# Altium PCB 4_Lay_PCB.PcbDoc (part 2 of 2)
Units mm, origin at the board's own origin, x right, y up, seen from the top; angles counter-clockwise.
Board outline 51.1 x 56.4 mm, 4 copper layers (Top, Signal Layer 1, Signal Layer 2, Bottom), stack 1.641 mm thick; 149 components, 81 nets, 422 pads, 267 vias.
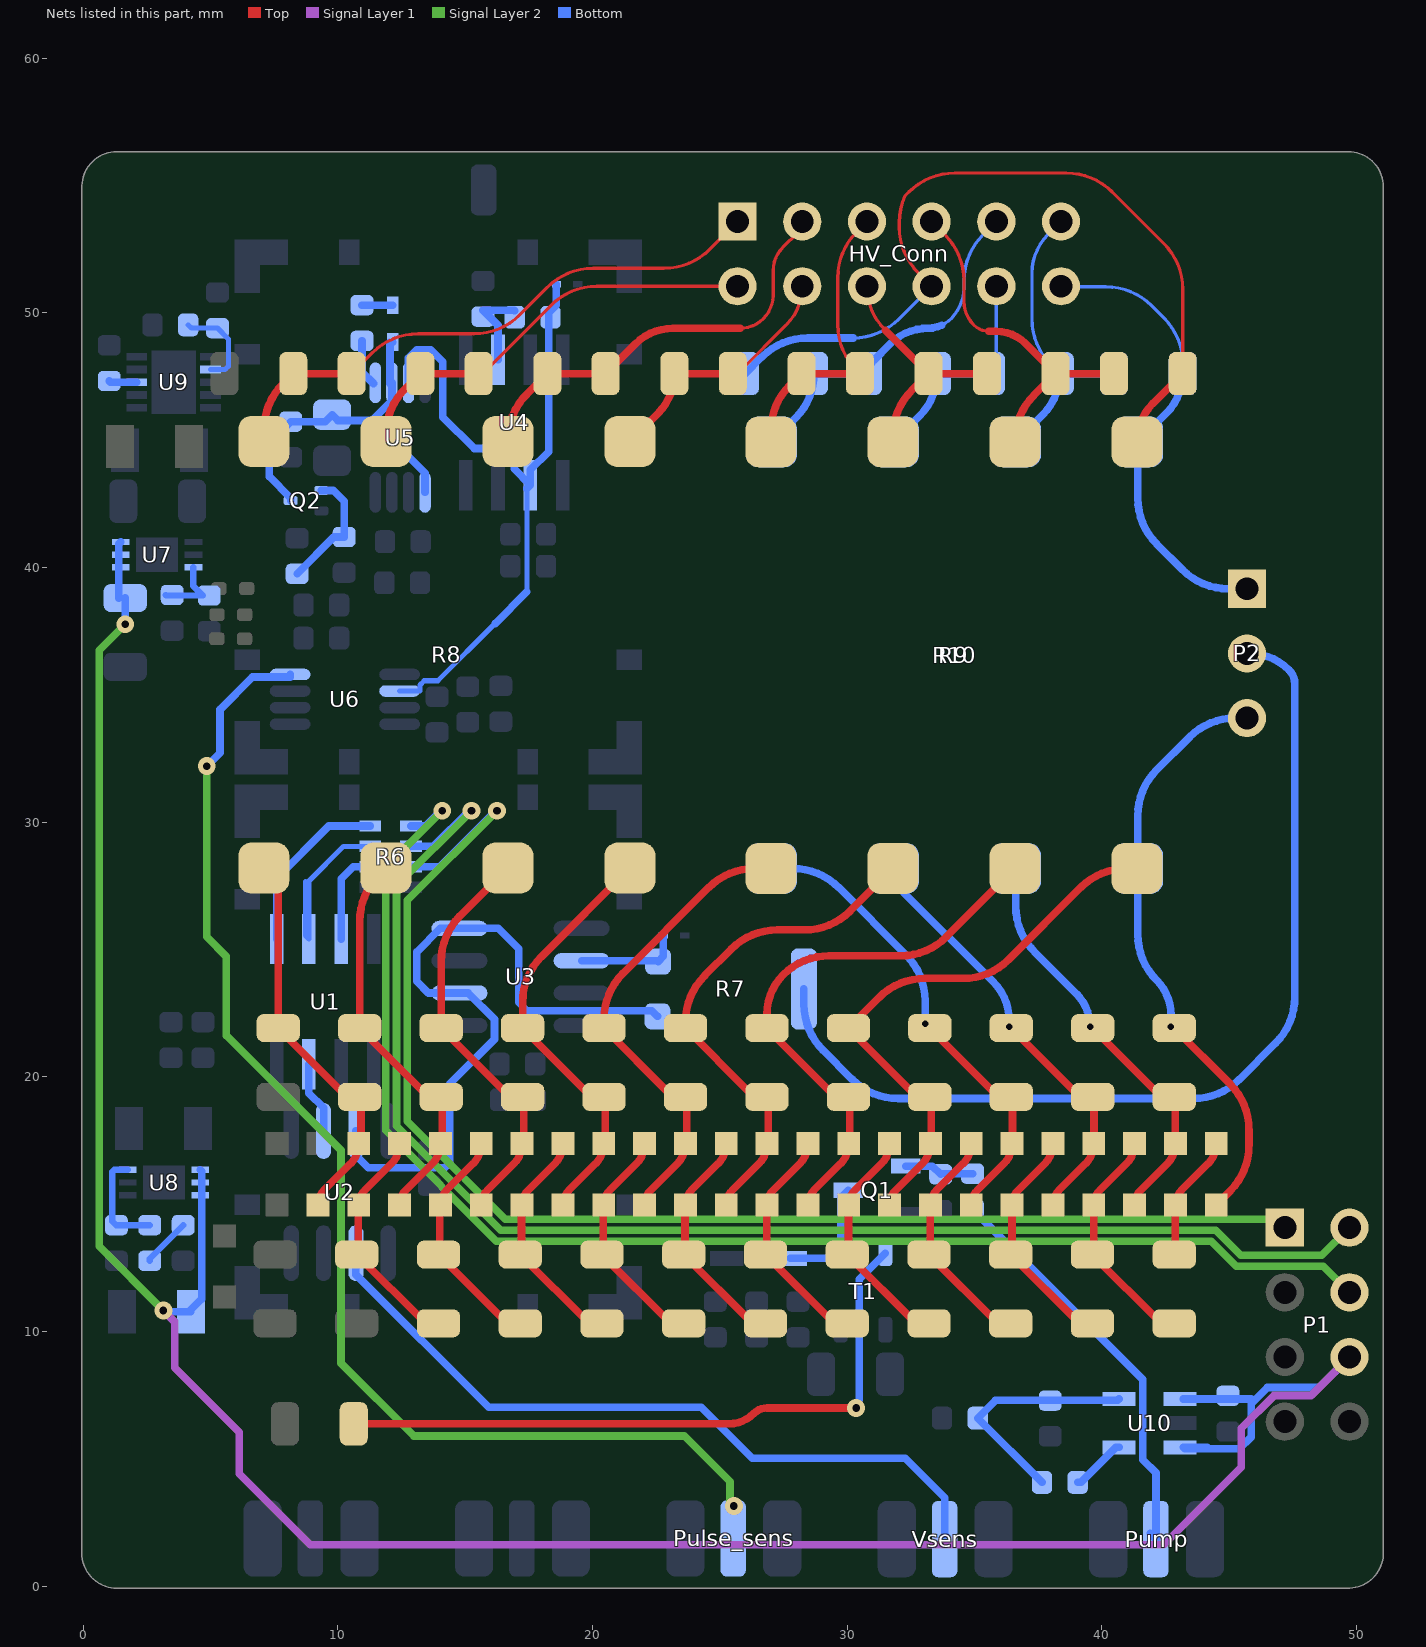
[diagram p4: the nets of this part, all layers, seen from the top]

## Via types
v1: diameter 0.6, hole 0.254, Top to Bottom, tented both sides, 175 vias
v2: diameter 0.6, hole 0.3, Top to Bottom, tented both sides, 53 vias
v3: diameter 0.7, hole 0.3, Top to Bottom, tented both sides, 17 vias
v4: diameter 0.6, hole 0.256, Top to Bottom, tented both sides, 13 vias
v5: diameter 0.6, hole 0.2, Top to Bottom, 4 vias
v6: diameter 3, hole 3, Top to Bottom, 4 vias
v7: diameter 1, hole 0.5, Top to Bottom, tented both sides, 1 vias

## Nets (pads, with @x,y where several pads share a name; then routed paths per layer and width w, separated by ;. In a path a pad name is that pad's centre, name@x,y a point inside that pad or via, vN(x,y) a via of type N, cw(c..) or ccw(c..) an arc to the next point about the centre after c; other vN are vias at no path point) (continued)
NetC7_1: C7.1 C8.2 D5.1 D6.2 | length 8.6
  Top w0.3: C7.1@10.745,13.023 C8.2@13.445,10.323 ; C7.1@10.795,13.145 D5.1@10.795,14.975 ; D5.1@10.821,14.975 cw(c11.626,14.975) 11.057,15.544 12.097,16.584 ccw(c11.306,17.375) D6.2@12.424,17.375
NetC8_1: C8.1 C9.2 D7.1 D8.2 | length 8.6
  Top w0.3: C8.1@13.954,13.023 C9.2@16.654,10.323 ; C8.1@14.005,13.145 D7.1@14.005,14.975 ; D7.1@14.028,14.975 cw(c14.833,14.975) 14.264,15.544 15.304,16.584 ccw(c14.513,17.375) D8.2@15.631,17.375
NetC9_1: C9.1 C10.2 D9.1 D10.2 | length 8.6
  Top w0.3: C9.1@17.164,13.023 C10.2@19.864,10.323 ; C9.1@17.214,13.145 D9.1@17.214,14.975 ; D9.1@17.235,14.975 cw(c18.039,14.975) 17.47,15.544 18.51,16.584 ccw(c17.72,17.375) D10.2@18.838,17.375
NetC10_1: C10.1 C11.2 D11.1 D12.2 | length 8.6
  Top w0.3: C10.1@20.374,13.023 C11.2@23.074,10.323 ; C10.1@20.424,13.145 D11.1@20.424,14.975 ; D11.1@20.441,14.975 cw(c21.246,14.975) 20.677,15.544 21.717,16.584 ccw(c20.926,17.375) D12.2@22.045,17.375
NetC11_1: C11.1 C12.2 D13.1 D14.2 | length 8.6
  Top w0.3: C11.1@23.583,13.023 C12.2@26.283,10.323 ; C11.1@23.634,13.145 D13.1@23.634,14.975 ; D13.1@23.648,14.975 cw(c24.453,14.975) 23.884,15.544 24.924,16.584 ccw(c24.133,17.375) D14.2@25.251,17.375
NetC12_1: C12.1 C13.2 D15.1 D16.2 | length 8.6
  Top w0.3: C12.1@26.793,13.023 C13.2@29.493,10.323 ; C12.1@26.843,13.145 D15.1@26.843,14.975 ; D15.1@26.855,14.975 cw(c27.66,14.975) 27.091,15.544 28.131,16.584 ccw(c27.34,17.375) D16.2@28.458,17.375
NetC13_1: C13.1 C14.2 D17.1 D18.2 | length 8.6
  Top w0.3: C13.1@30.002,13.023 C14.2@32.702,10.323 ; C13.1@30.053,13.145 D17.1@30.053,14.975 ; D17.1@30.062,14.975 cw(c30.866,14.975) 30.297,15.544 31.337,16.584 ccw(c30.547,17.375) D18.2@31.665,17.375
NetC14_1: C14.1 C15.2 D19.1 D20.2 | length 8.6
  Top w0.3: C14.1@33.212,13.023 C15.2@35.912,10.323 ; C14.1@33.263,13.145 D19.1@33.263,14.975 ; D19.1@33.268,14.975 cw(c34.073,14.975) 33.504,15.544 34.544,16.584 ccw(c33.753,17.375) D20.2@34.872,17.375
NetC15_1: C15.1 C16.2 D21.1 D22.2 | length 8.6
  Top w0.3: C15.1@36.422,13.023 C16.2@39.122,10.323 ; C15.1@36.472,13.145 D21.1@36.472,14.975 ; D21.1@36.475,14.975 cw(c37.28,14.975) 36.711,15.544 37.751,16.584 ccw(c36.96,17.375) D22.2@38.078,17.375
NetC16_1: C16.1 C17.2 D23.1 D24.2 | length 9.3
  Top w0.3: D24.2@41.285,17.375 cw(c40.167,17.375) 40.958,16.584 39.918,15.544 ccw(c40.487,14.975) D23.1@39.682,14.975 39.682,13.145 cw(c39.509,13.145) C16.1@39.631,13.023 42.331,10.323 C17.2@42.841,10.323
NetC17_1: C17.1 D25.1 D26.2 | length 4.9
  Top w0.3: C17.1@42.841,13.023 ccw(c42.726,13.138) 42.889,13.138 D25.1@42.889,14.975 cw(c43.693,14.975) 43.124,15.544 44.164,16.584 ccw(c43.374,17.375) D26.2@44.492,17.375
NetC18_1: C18.1 C19.2 D4.1 D5.2 R8.8 | length 14.8
  Top w0.3: R8.8@7.096,28.197 7.662,27.631 C18.1@7.662,21.913 C19.2@10.172,19.403 ; D4.1@9.218,14.975 cw(c10.023,14.975) 9.453,15.544 10.494,16.584 ccw(c9.703,17.375) D5.2@10.821,17.375 ; D5.2@10.908,17.375 C19.2@10.908,19.098
NetC19_1: C19.1 C20.2 D6.1 D7.2 R8.7 | length 14.9
  Top w0.3: R8.7@11.887,28.197 11.604,27.914 ccw(c13.4,26.118) 10.86,26.118 C19.1@10.86,21.913 C20.2@13.371,19.403 ; D6.1@12.424,14.975 cw(c13.229,14.975) 12.66,15.544 13.7,16.584 ccw(c12.909,17.375) D7.2@14.028,17.375 ; D7.2@14.106,17.375 C20.2@14.106,19.098
NetC20_1: C20.1 C21.2 D8.1 D9.2 R8.6 | length 15.5
  Top w0.3: D8.1@15.631,14.975 cw(c16.436,14.975) 15.867,15.544 16.907,16.584 ccw(c16.116,17.375) D9.2@17.235,17.375 ; C21.2@16.569,19.403 C20.1@14.058,21.913 14.058,24.524 cw(c16.598,24.524) 14.802,26.32 R8.6@16.679,28.197 ; D9.2@17.304,17.375 C21.2@17.304,19.098
NetC21_1: C21.1 C22.2 D10.1 D11.2 R8.5 | length 16.2
  Top w0.3: D10.1@18.838,14.975 cw(c19.643,14.975) 19.074,15.544 20.114,16.584 ccw(c19.323,17.375) D11.2@20.441,17.375 ; C22.2@19.767,19.403 C21.1@17.256,21.913 17.256,22.931 cw(c19.796,22.931) 18,24.727 R8.5@21.471,28.197 ; D11.2@20.502,17.375 C22.2@20.502,19.098
NetC22_1: C22.1 C23.2 D12.1 D13.2 R9.8 | length 18
  Top w0.3: D12.1@22.045,14.975 cw(c22.85,14.975) 22.28,15.544 23.321,16.584 ccw(c22.53,17.375) D13.2@23.648,17.375 ; C23.2@22.965,19.403 C22.1@20.454,21.913 20.454,22.27 cw(c22.994,22.27) 21.198,24.066 24.571,27.439 cw(c26.367,25.643) 26.367,28.183 R9.8@27,28.183 ; D13.2@23.7,17.375 C23.2@23.7,19.098
NetC23_1: C23.1 C24.2 D14.1 D15.2 R9.7 | length 19.4
  Top w0.3: D14.1@25.251,14.975 cw(c26.056,14.975) 25.487,15.544 26.527,16.584 ccw(c25.736,17.375) D15.2@26.855,17.375 ; C24.2@26.163,19.403 C23.1@23.652,21.913 23.652,22.166 cw(c26.192,22.166) 24.396,23.962 25.46,25.026 cw(c27.256,23.23) 27.256,25.77 28.327,25.77 ccw(c28.327,28.31) 30.123,26.514 R9.7@31.792,28.183 ; D15.2@26.898,17.375 C24.2@26.898,19.098
NetC24_1: C24.1 C25.2 D16.1 D17.2 R9.6 | length 21.1
  Top w0.3: D16.1@28.458,14.975 cw(c29.263,14.975) 28.694,15.544 29.734,16.584 ccw(c28.943,17.375) D17.2@30.062,17.375 ; C25.2@29.361,19.403 C24.1@26.851,21.913 26.851,22.461 cw(c29.041,22.461) 27.492,24.01 cw(c29.288,22.214) 29.288,24.754 32.103,24.754 ccw(c32.103,27.294) 33.899,25.498 R9.6@36.584,28.183 ; D17.2@30.096,17.375 C25.2@30.096,19.098
NetC25_1: C25.1 C26.2 D18.1 D19.2 R9.5 | length 21.9
  Top w0.3: D18.1@31.665,14.975 cw(c32.47,14.975) 31.901,15.544 32.941,16.584 ccw(c32.15,17.375) D19.2@33.268,17.375 ; C26.2@32.559,19.403 C25.1@30.049,21.913 31.257,23.121 cw(c33.053,21.325) 33.053,23.865 34.55,23.865 ccw(c34.55,26.405) 36.346,24.609 39.176,27.439 cw(c40.972,25.643) 40.972,28.183 R9.5@41.375,28.183 ; D19.2@33.294,17.375 C26.2@33.294,19.098
NetC26_1: C26.1 C27.2 D20.1 D21.2 R10.5 | length 17.7
  Top w0.3: C26.1@33.247,21.913 C27.2@35.757,19.403 ; D20.1@34.872,14.975 cw(c35.677,14.975) 35.107,15.544 36.148,16.584 ccw(c35.357,17.375) D21.2@36.475,17.375 ; D21.2@36.492,17.375 C27.2@36.492,19.098
  Bottom w0.3: R10.5@27.035,28.183 27.865,28.183 cw(c27.865,25.643) 29.661,27.439 32.318,24.782 cw(c30.522,22.986) 33.062,22.986 v1(33.062,22.087)
NetC27_1: C27.1 C28.2 D22.1 D23.2 R10.6 | length 16.2
  Top w0.3: C27.1@36.445,21.913 C28.2@38.955,19.403 ; D22.1@38.078,14.975 cw(c38.883,14.975) 38.314,15.544 39.354,16.584 ccw(c38.563,17.375) D23.2@39.682,17.375 ; D23.2@39.691,17.375 C28.2@39.691,19.098
  Bottom w0.3: R10.6@31.826,28.183 ccw(c33.136,28.183) 32.21,27.257 35.735,23.732 cw(c34.218,22.214) 36.364,22.214 v1(36.364,21.96)
NetC28_1: C28.1 C29.2 D24.1 D25.2 R10.7 | length 16.3
  Top w0.3: C28.1@39.643,21.913 42.153,19.403 ccw(c42.889,20.138) 42.889,19.098 D25.2@42.889,17.375 cw(c41.77,17.375) 42.561,16.584 41.521,15.544 ccw(c42.09,14.975) D24.1@41.285,14.975
  Bottom w0.3: R10.7@36.618,28.183 36.618,26.695 ccw(c39.158,26.695) 37.362,24.899 39,23.261 cw(c37.699,21.96) v1(39.539,21.96)
NetC29_1: C29.1 D26.1 P2.3 R10.8 | length 23.4
  Top w0.3: C29.1@42.841,21.913 45.031,19.723 cw(c43.235,17.927) 45.775,17.927 45.775,17.31 cw(c43.235,17.31) 45.031,15.514 D26.1@44.492,14.975
  Bottom w0.3: v1(42.714,21.96) 42.714,22.437 ccw(c40.801,22.437) 42.154,23.79 cw(c43.95,25.586) 41.41,25.586 R10.8@41.41,28.183 41.41,30.258 cw(c43.95,30.258) 42.154,32.054 43.441,33.341 cw(c45.237,31.545) 45.237,34.085 P2.3@45.7,34.085
NetC55_1: C55.1 R19.1 U7.3 | length 2.7
  Bottom w0.25: R19.1@3.245,38.921 3.266,38.9 4.7,38.9 4.329,39.271 U7.3@4.329,40.004
NetC58_1: C58.1 R20.2 U8.3 | length 4.1
  Bottom w0.25: U8.3@1.75,16.35 1.225,16.35 1.148,16.273 1.148,14.329 C58.1@1.303,14.175 R20.2@2.615,14.175
NetC61_1: C61.1 R23.2 U9.7 | length 3.6
  Bottom w0.2: R23.2@4.125,49.525 4.25,49.4 C61.1@5.275,49.4 5.7,48.975 5.7,47.9 5.575,47.775 U9.7@5,47.775
NetC63_1: C63.1 U10.4 | length 2.2
  Bottom w0.3: C63.1@39.05,4.075 39.18,4.075 40.555,5.45 U10.4@40.675,5.45
NetC63_2: C63.2 C64.1 R3.2 U10.5 | length 9.4
  Bottom w0.3: C63.2@37.65,4.075 R3.2@35.125,6.6 35.825,7.3 40.625,7.3 U10.5@40.675,7.35
NetD1_K: D1.K Q1.3 T1.4 | length 4.7
  Bottom w0.3: D1.K@27.771,12.872 29.546,12.872 T1.4@29.746,13.072 29.746,15.247 Q1.3@30.046,15.547
NetD27_2: D27.2 R7.3 U3.2 | length 4.1
  Bottom w0.3: U3.2@19.575,24.56 22.575,24.56 R7.3@22.575,24.525 22.78,24.73 D27.2@22.78,25.55
NetD28_1: D28.1 R11.2 | length 1.2
  Bottom w0.3: R11.2@10.95,50.3 D28.1@12.15,50.3
NetP2_2: P2.2 R7.1 | length 38.6
  Bottom w0.3: R7.1@28.3,23.45 28.3,22.852 ccw(c30.84,22.852) 29.044,21.056 30.206,19.894 ccw(c32.002,21.69) 32.002,19.15 43.598,19.15 ccw(c43.598,21.69) 45.394,19.894 46.831,21.331 ccw(c45.035,23.127) 47.575,23.127 47.575,35.432 ccw(c46.807,35.432) 47.35,35.975 ccw(c45.781,34.406) 45.781,36.625 P2.2@45.7,36.625
NetQ1_1: Q1.1 R4.2 R5.2 | length 2.8
  Bottom w0.3: Q1.1@32.296,16.497 33.346,16.497 R5.2@33.671,16.172 33.671,16.197 R4.2@34.921,16.197
NetQ2_1: Q2.1 R13.1 R16.1 | length 4.9
  Bottom w0.3: R16.1@8.4,39.75 9.85,41.2 R13.1@10.25,41.2 10.25,42.6 9.825,43.025 Q2.1@9.35,43.025
NetR6_1: R6.1 U1.1 | length 6.9
  Bottom w0.3: U1.1@7.595,25.414 7.595,27.795 9.65,29.85 R6.1@11.275,29.85
NetR6_2: R6.2 U1.2 | length 7.6
  Bottom w0.2: 8.725,27.675 8.725,25.554 U1.2@8.865,25.414 8.865,27.69 10.225,29.05 R6.2@11.275,29.05
NetR6_3: R6.3 U1.3 | length 3.7
  Bottom w0.3: U1.3@10.135,25.414 10.135,27.785 10.6,28.25 R6.3@11.275,28.25
NetR11_1: R11.1 U5.1 | length 1.9
  Bottom w0.3: R11.1@10.95,48.9 10.95,47.675 U5.1@11.4,47.225
NetR12_2: R12.2 R14.2 U4.2 | length 3.4
  Bottom w0.3: U4.2@16.29,48.164 16.29,49.51 15.7,50.1 16.89,50.1 cw(c16.89,50.015) R14.2@16.95,50.075
NetR20_1: R20.1 R21.2 | length 1.9
  Bottom w0.25: R20.1@2.615,12.775 2.615,12.862 R21.2@3.928,14.175
NetR22_2: R22.2 U9.3 | length 1.1
  Bottom w0.3: R22.2@1.025,47.325 1.075,47.275 U9.3@2.104,47.275
NetU1_7: U1.7 U2.2 | length 2.8
  Bottom w0.3: U1.7@8.865,20.486 8.865,19.36 9.44,18.785 U2.2@9.44,17.875
PEAKVOLTAGE: C44.1 D28.2 Q2.3 R15.1 U5.2 U5.5 | length 14.4
  Bottom w0.3: Q2.3@8.15,42.625 8.15,42.725 7.3,43.575 7.3,44.875 R15.1@8.15,45.725 9.5,45.725 C44.1@9.775,46 10,45.775 11.35,45.775 ; U5.2@12.05,47.225 12.05,48.85 D28.2@12.15,48.85 ; U5.2@12.125,47.25 12.125,46.55 11.35,45.775 ; U5.5@13.425,42.95 13.425,43.7 11.35,45.775
PREAMPSIGOUT: D29.1 R14.1 U4.6 U5.3 U6.2 | length 28.9
  Bottom w0.2: U6.2@12.425,35.15 13.223,35.15 13.223,35.384 13.391,35.552 13.927,35.552 16.175,37.8 ; 17.425,39.05 U4.6@17.425,43.101
  Bottom w0.3: U5.3@12.775,47.25 12.775,48.225 13.1,48.55 13.65,48.55 14.125,48.075 14.125,45.9 15.35,44.675 16.525,44.675 16.925,44.275 16.925,43.871 U4.6@17.56,43.236 ; 16.175,37.8 17.425,39.05 ; U4.6@17.425,43.101 U4.6@17.56,43.236 ; D29.1@18.58,51.125 18.58,50.305 18.275,50 18.275,44.55 17.56,43.835 U4.6@17.56,43.236
PULSE: Pump.1 R4.1 | length 16.2
  Bottom w0.3: R4.1@34.921,14.797 41.602,8.116 41.602,4.973 42.125,4.45 Pump.1@42.125,1.85 Pump.1@41.902,2.073
PULSESENS: Pulse_sens.1 U6.8 | length 49.7
  Signal Layer 2 w0.3: v3(4.85,32.2) 4.85,25.5 5.625,24.725 5.625,21.625 10.125,17.125 10.125,8.75 12.975,5.9 23.6,5.9 25.4,4.1 25.4,3.3 v3(25.55,3.15)
  Bottom w0.3: v3(4.85,32.2) 5.375,32.725 5.375,34.425 6.648,35.698 8.125,35.698 U6.8@8.125,35.8
PUMP: C5.2 T1.3 | length 26.8
  Top w0.3: C5.2@10.625,6.375 25.359,6.375 ccw(c25.359,7.741) 26.325,6.775 ; 26.325,6.775 cw(c26.868,6.232) 26.868,7 v3(30.35,7)
  Bottom w0.3: v3(30.35,7) 30.35,6.789 ccw(c29.033,7.367) 30.471,7.367 30.471,12.047 T1.3@31.496,13.072
UP1: C31.1 C32.2 HV_Conn.1 R8.4 | length 22.5
  Top w0.127: C32.2@10.539,47.614 11.356,48.431 cw(c13.152,46.635) 13.152,49.175 15.348,49.175 ccw(c15.348,51.715) 17.144,49.919 18.231,51.006 cw(c20.027,49.21) 20.027,51.75 22.811,51.75 ccw(c22.811,54.29) 24.607,52.494 HV_Conn.1@25.696,53.583
  Top w0.3: R8.4@7.096,44.947 7.096,45.408 cw(c9.636,45.408) 7.84,47.204 C31.1@8.25,47.614 C32.2@10.539,47.614
UP2: C32.1 C33.2 HV_Conn.2 R8.3 | length 16.9
  Top w0.127: C33.2@15.529,47.614 ccw(c15.529,48.001) 15.802,47.727 18.374,50.299 cw(c20.17,48.503) 20.17,51.043 HV_Conn.2@25.696,51.043
  Top w0.3: R8.3@11.887,44.947 11.887,45.21 cw(c14.427,45.21) 12.631,47.006 C32.1@13.239,47.614 C33.2@15.529,47.614
UP3: C33.1 C34.2 HV_Conn.3 R8.2 | length 16.7
  Top w0.127: 25.792,49.392 ccw(c25.792,50.693) 26.712,49.773 ccw(c25.792,50.693) 27.093,50.693 27.093,51.647 cw(c28.394,51.647) 27.474,52.567 28.056,53.149 ccw(c27.623,53.583) HV_Conn.3@28.236,53.583
  Top w0.3: R8.2@16.679,44.947 16.679,45.012 cw(c19.219,45.012) 17.423,46.808 C33.1@18.229,47.614 C34.2@20.518,47.614 21.688,48.784 cw(c23.156,47.315) 23.156,49.392 25.792,49.392
UP4: C34.1 C35.2 HV_Conn.4 R8.1 | length 10.1
  Top w0.127: C35.2@25.83,47.748 27.607,49.525 ccw(c26.09,51.043) HV_Conn.4@28.236,51.043
  Top w0.3: R8.1@21.471,44.947 22.567,46.044 ccw(c20.997,47.614) C34.1@23.218,47.614 C35.2@25.507,47.614 ccw(c25.507,48.07) C35.2@25.83,47.748
UP5: C35.1 C36.2 HV_Conn.5 R9.4 | length 11.9
  Top w0.127: C36.2@30.377,47.733 cw(c32.173,49.53) 29.633,49.53 29.633,51.388 cw(c32.173,51.388) 30.377,53.184 HV_Conn.5@30.776,53.583
  Top w0.3: R9.4@27,44.933 27,45.355 cw(c29.54,45.355) 27.744,47.151 C35.1@28.207,47.614 C36.2@30.496,47.614 C36.2@30.377,47.733
UP6: C36.1 C37.2 HV_Conn.6 R9.3 | length 9.8
  Top w0.127: HV_Conn.6@30.776,51.043 ccw(c33.211,51.043) 31.093,49.842 ccw(c33.211,51.043) 31.16,49.73 ccw(c33.211,51.043) 31.489,49.321
  Top w0.3: 31.489,49.321 C36.1@33.196,47.614 ; R9.3@31.792,44.933 31.792,45.157 cw(c34.332,45.157) 32.536,46.954 C36.1@33.196,47.614 ; C37.2@35.486,47.614 C36.1@33.196,47.614
UP7: C37.1 C38.2 HV_Conn.7 R9.2 | length 14
  Top w0.127: HV_Conn.7@33.316,53.583 33.842,53.057 cw(c32.046,51.261) 34.586,51.261 34.586,50.461 ccw(c35.918,50.461) 34.976,49.519 ccw(c35.567,50.11) 35.567,49.274
  Top w0.3: 35.567,49.274 35.856,49.274 cw(c35.856,47.658) 36.999,48.801 C37.1@38.186,47.614 ; R9.2@36.584,44.933 36.584,44.96 cw(c39.124,44.96) 37.328,46.756 C37.1@38.186,47.614 ; C38.2@40.475,47.614 C37.1@38.186,47.614
UP8: C38.1 C39.2 HV_Conn.8 R9.1 | length 32.6
  Top w0.127: HV_Conn.8@33.316,51.043 32.79,51.569 cw(c34.586,53.365) 32.046,53.365 32.046,53.547 cw(c34.586,53.547) 32.27,54.591 32.424,54.744 cw(c34.22,52.948) 34.22,55.488 38.614,55.488 cw(c38.614,52.948) 40.41,54.744 42.431,52.723 cw(c40.635,50.927) 43.175,50.927 C38.1@43.175,47.614
  Top w0.3: R9.1@41.375,44.933 cw(c43.503,44.933) 41.999,46.438 C38.1@43.175,47.614
  Bottom w0.127: 30.232,49.011 ccw(c30.232,51.551) 32.028,49.755 HV_Conn.8@33.316,51.043
  Bottom w0.3: C39.2@25.997,47.614 26.65,48.267 cw(c28.446,46.471) 28.446,49.011 30.232,49.011
UP9: C39.1 C40.2 HV_Conn.9 R10.1 | length 13.9
  Bottom w0.127: 33.717,49.518 ccw(c33.158,50.693) 34.078,49.773 ccw(c32.852,50.999) 34.586,50.999 34.586,51.261 cw(c37.126,51.261) 35.33,53.057 HV_Conn.9@35.856,53.583
  Bottom w0.3: R10.1@27.035,44.933 27.977,45.875 ccw(c26.238,47.614) C39.1@28.697,47.614 C40.2@30.823,47.614 cw(c31.55,47.614) C40.2@31.036,48.128 ; C40.2@31.036,48.128 31.693,48.785 cw(c33.158,47.32) 32.958,49.382 cw(c33.158,47.32) 33.158,49.392 ccw(c33.158,50.693) 33.717,49.518
UP10: C40.1 C41.2 HV_Conn.10 R10.2 | length 8.9
  Bottom w0.127: C41.2@35.856,48.114 HV_Conn.10@35.856,51.043
  Bottom w0.3: R10.2@31.826,44.933 32.827,45.934 ccw(c31.147,47.614) C40.1@33.523,47.614 C41.2@35.649,47.614 ccw(c35.149,48.114) C41.2@35.856,48.114
UP11: C41.1 C42.2 HV_Conn.11 R10.3 | length 12.6
  Bottom w0.127: C41.1@37.997,47.966 cw(c39.793,49.762) 37.253,49.762 37.253,51.551 cw(c39.399,51.551) 37.882,53.069 HV_Conn.11@38.396,53.583
  Bottom w0.3: R10.3@36.618,44.933 37.677,45.992 ccw(c36.055,47.614) C41.1@38.349,47.614 ; C41.1@37.997,47.966 C41.1@38.349,47.614 ; C41.1@38.523,48.034 cw(c37.929,48.034) C41.1@38.349,47.614 ; C42.2@40.475,47.614 C41.1@38.349,47.614
UP12: C42.1 HV_Conn.12 P2.1 R10.4 | length 18.1
  Bottom w0.127: HV_Conn.12@38.777,51.021 40.16,51.021 cw(c40.16,48.481) 41.956,50.277 42.431,49.802 cw(c40.635,48.006) C42.1@43.175,48.006
  Bottom w0.3: C42.1@43.175,48.006 C42.1@43.175,47.614 cw(c40.964,47.614) 42.528,46.051 R10.4@41.41,44.933 41.41,42.717 ccw(c43.95,42.717) 42.154,40.921 43.166,39.909 ccw(c44.962,41.705) 44.962,39.165 P2.1@45.7,39.165
V_IN: C3.1 C56.1 C62.1 P1.6 U7.4 U7.5 U7.6 U8.4 U8.5 U8.6 U10.1 U10.3 | length 107.4
  Signal Layer 1 w0.3: v3(3.15,10.825) 3.6,10.375 3.6,8.578 6.129,6.049 6.129,4.41 8.914,1.625 42.425,1.625 45.475,4.675 45.475,6.202 46.76,7.487 48.212,7.487 P1.6@49.725,9
  Signal Layer 2 w0.3: v3(1.65,37.775) 0.625,36.75 0.625,13.35 v3(3.15,10.825)
  Bottom w0.3: C3.1@1.4,38.8 1.4,40.925 U7.6@1.479,41.004 ; v3(1.65,37.775) C3.1@1.65,38.8 ; v3(3.15,10.825) 3.2,10.775 C56.1@4.225,10.775 ; C56.1@4.225,10.85 4.655,11.28 4.655,16.295 U8.4@4.6,16.35 ; U10.1@43.2,7.35 45.859,7.35 45.859,7.168 ; 44.141,5.45 43.2,5.45 43.252,5.398 45.398,5.398 45.859,5.859 45.859,7.168 ; P1.6@49.725,9 48.525,7.8 46.491,7.8 45.859,7.168
VDIGISENSCAN: U2.6 Vsens.1 | length 29
  Bottom w0.3: U2.6@10.71,13.075 10.71,12.24 15.925,7.025 24.275,7.025 26.275,5.025 32.275,5.025 33.825,3.475 Vsens.1@33.825,2.025
VDIGISETCANCLK: P1.4 R6.5 | length 55.4
  Signal Layer 2 w0.3: v3(14.101,30.451) 11.875,28.226 11.875,17.9 16.225,13.55 44.296,13.55 45.279,12.567 48.698,12.567 P1.4@49.725,11.54
  Bottom w0.3: R6.5@12.875,29.85 13.45,29.85 14.051,30.451 v3(14.101,30.451)
VDIGISETCANCS: P1.1 R6.7 | length 54.1
  Signal Layer 2 w0.3: v3(16.251,30.451) 12.729,26.93 12.729,18.254 16.579,14.404 46.861,14.404 P1.1@47.185,14.08
  Bottom w0.3: R6.7@12.875,28.25 14,28.25 16.201,30.451 v3(16.251,30.451)
VDIGISETCANDIN: P1.2 R6.6 | length 56.5
  Signal Layer 2 w0.3: v3(15.251,30.451) 12.302,27.503 12.302,18.077 16.402,13.977 44.473,13.977 45.456,12.994 48.639,12.994 P1.2@49.725,14.08
  Bottom w0.3: R6.6@12.875,29.05 13.75,29.05 15.151,30.451 v3(15.251,30.451)
VSENS: R7.2 U2.3 U3.6 U3.8 | length 28.6
  Bottom w0.3: U2.3@10.71,17.875 10.71,16.915 11.2,16.425 14.2,16.425 14.4,16.625 14.4,19.725 16.152,21.477 16.152,22.259 15.121,23.29 U3.6@14.775,23.29 13.56,23.29 13.1,23.75 13.1,24.9 14.03,25.83 U3.8@14.775,25.83 16.295,25.83 17.1,25.025 17.1,22.925 17.425,22.6 22.325,22.6 R7.2@22.55,22.375
pads on no net: R6.4 R6.8 U1.4 U2.1 U2.5 U2.8 U3.5 U4.4 U4.8 U6.7
copper on no net:
  other v6: 3,3.175 48.025,3.25 3,53.025 48.025,53.05

## Polygon pours and split planes (outlines as drawn)
+5ANALOG on Signal Layer 2 "+5A" (solid, pour order 59): 0.907,20.367 3.943,20.367 5.95,18.36 5.95,11.725 5.925,11.7 5.85,11.625 2.9,11.625 2.749,11.625 0.907,13.467
GND on Signal Layer 2 "GND" (solid, pour order 101): 22.075,13.125 50.35,13.125 51.05,12.425 51.15,12.325 51.15,-0.725 37.05,-0.725 36.975,-0.8 36.7,-0.525 36.7,4.225 36.65,4.225 34.25,6.625 34.2,6.675 27.175,6.675 27.05,6.675 22.2,11.525
NEGATIVE_V_IN on Signal Layer 2 "+5A" (solid, pour order 61): 5.675,49.575 1.525,49.575 1.525,45.68 1.738,45.467 2.072,45.8 5.7,45.8
+2.5ANALOG on Signal Layer 2 "+2.5" (solid, pour order 64): 1.567,46.18 3.914,46.18 3.914,39.789 3.875,39.75 2.416,38.291 1.668,38.291
AGND on Signal Layer 2 "Top Layer-No Net" (solid, pour order 68): 21.975,52.9 5.975,52.9 5.975,31.85 5.975,31.9 21.975,31.9
AGND on Signal Layer 2 "Top Layer-No Net" (solid, pour order 70): 21.95,31.475 5.95,31.475 5.95,10.45 21.95,10.45 21.95,31.475
AGND on Signal Layer 2 "Top Layer-No Net" (solid, pour order 73): 6.05,11.475 6.05,0.15 6.225,-0.025 6.275,0.025 36.35,0.025 36.35,3.95 34.2,6.1 27.3,6.1 26.55,6.85 21.925,11.475 17.825,11.475
AGND on Signal Layer 2 "Top Layer-No Net" (solid, pour order 77): 21.375,26.45 23.284,26.45 cw(c23.284,25.084) 24.25,26.05 24.25,23.791 cw(c22.884,23.791) 23.85,22.825 cw(c23.609,23.066) 23.609,22.725 20.8,22.725
AGND on Signal Layer 2 "Top Layer-No Net" (solid, pour order 80): 6.375,46.55 0.546,46.55 ccw(c0.546,46.379) 0.425,46.5 0.425,8.55 5.75,3.225 5.8,3.175 6.75,3.175
GND on Bottom "+5A" (solid, pour order 105): 51.237,8.575 41.85,8.575 41.075,7.8 42.981,5.894 42.981,0.313 51.437,0.313 52.675,-0.925
AGND on Bottom "+5A" (solid, pour order 103): 11.125,11.6 11.075,11.55 11.075,6.75 7.15,6.75 7.025,6.875 6.6,7.3 6.6,11.825
AGND on Bottom "Top Layer-No Net" (solid, pour order 99): 36.875,-0.15 36.875,4.25 34.975,6.15 31.8,9.325 6.25,9.325 6.25,0.1 6.3,0.05
GND on Bottom "Top Layer-No Net" (solid, pour order 87): 0.025,42.525 5.5,42.525 5.775,42.8 5.575,43 5.575,51.425 0,51.425 -0.1,51.525
GND on Bottom "Top Layer-No Net" (solid, pour order 83): 0.525,17.45 0.55,17.425 2.9,17.425 2.9,20.4 1.55,21.75 1.325,21.975 1.325,33.7 1.325,34.4 3.775,36.85 3.875,36.95 4.875,36.95 4.875,43.275 4.25,43.9 4.225,43.925 -0.05,43.925 -0.05,17.375
GND on Bottom "Top Layer-No Net" (solid, pour order 81): -0.05,19.175 5.35,19.175 5.675,18.85 5.675,14.675 5.675,13.05 5.675,9.15 1.625,9.15 -0.05,9.15
AGND on Bottom "Top Layer-No Net" (solid, pour order 67): 6,52.85 6,31.85 22,31.85 21.925,31.85 21.925,52.85 19.125,52.85 19.125,45.65 13.65,45.65 13.65,52.9
GND on Bottom "Top Layer-No Net" (solid, pour order 69): 36.146,17.172 23.546,17.172 23.875,8.8 36.121,8.25 36.121,17.197
AGND on Bottom "Top Layer-No Net" (solid, pour order 71): 21.925,31.45 5.95,31.45 5.95,10.4 21.975,10.4
GND on Bottom "Top Layer-No Net" (solid, pour order 72): 38.425,0.125 38.425,3.75 35.1,7.075 32.275,9.9 32.275,17.05 36.875,17.05 45.25,8.675 45.725,8.2 45.725,0.175
GND on Bottom "+5A" (solid, pour order 58): 39.384,6.46 39.149,6.225 31.025,6.225 29.725,6.225 28.975,6.975 28.85,7.1 28.85,12.85 29.35,12.85 32.825,16.325 34.537,14.613 36.121,14.613 36.121,13.254 41.825,7.55
AGND on Top "+5A" (solid, pour order 109): 13.864,49.637 9.878,49.122 6.303,49.122 5.303,50.122 5.028,50.397 5.028,56.122 12.903,56.122 13.003,56.022
GND on Top "+5A" (solid, pour order 107): 51.275,7.85 45.575,7.85 44.85,7.125 45,6.975 45,-0.05 51.45,-0.05 51.6,-0.2
+5ANALOG on Top "+5A" (solid, pour order 63): 2.006,16.775 4.425,16.775 4.425,16.675 4.45,16.65 4.45,14.825 4.6,8.7 0.425,8.8 0.425,15.05
+2.5ANALOG on Top "+2.5" (solid, pour order 65): 1.608,42.975 3.914,42.975 3.914,38.614 3.9,38.6 1.664,38.6
AGND on Top "Top Layer-No Net" (solid, pour order 93): 5.225,36.525 3.725,36.65 1.4,34.325 1.444,34.281 1.444,22.444 1.444,21.956 2.55,20.85 2.775,21.075 5.4,21.075 5.4,29.925 5.225,30.85
NEGATIVE_V_IN on Top "Top Layer-No Net" (solid, pour order 89): 0.95,46.225 0.975,46.2 4.825,46.2 4.825,50.825 4.25,51.4 4.05,51.2 -0.025,51.2 -0.025,49.225 0,49.2 0,46.2
AGND on Top "Top Layer-No Net" (solid, pour order 74): 21.775,41.9 6.025,41.9 6.025,30.775 21.825,30.775 21.825,30.85
GND on Top "Top Layer-No Net" (solid, pour order 75): 0.275,46.075 5.425,46.075 5.425,36.8 3.45,36.6 1.533,33.939 1.332,22.404 2.375,20.915 5.425,20.915 5.597,15.05 0.1,15.05
AGND on Top "Top Layer-No Net" (solid, pour order 76): 6.2,4.35 16.9,5.6 25.275,5.6 26.55,5.969 35.85,5.969 35.85,0.625 35.85,0.45 6.125,0.45
GND on Top "Top Layer-No Net" (solid, pour order 79): 45.75,0.3 37.86,0.3 ccw(c37.86,0.215) 37.8,0.275 37.319,0.756 cw(c39.115,2.552) 36.575,2.552 36.575,7.525 45.765,7.525 cw(c45.765,7.44) 45.825,7.5
+5ANALOG on Signal Layer 1 "+5A" (solid, pour order 60): 1.4,20.8 3.65,20.8 5.325,19.125 5.2,19 5.2,12.225 2.822,12.225 1.433,13.613
NEGATIVE_V_IN on Signal Layer 1 "GND" (solid, pour order 62): 5.15,49.125 5.1,49.075 1.5,49.075 1.5,45.2 1.525,45.175 1.75,45.4 5.2,45.4
+2.5ANALOG on Signal Layer 1 "+2.5" (solid, pour order 66): 1.608,42.975 3.914,42.975 3.914,39.789 3.875,39.75 2.35,38.225 1.669,38.225
AGND on Signal Layer 1 "Top Layer-No Net" (solid, pour order 97): 36.7,0.025 36.7,4.775 32.7,8.775 32.6,8.875 5.8,8.875 5.4,8.875 3.375,6.85 5,5.225 5,0.1
GND on Signal Layer 1 "Top Layer-No Net" (solid, pour order 95): 0.025,50.95 0.1,50.875 5.275,50.875 5.275,37.675 4.175,36.575 1.799,34.199 1.799,33.864 1.799,22.551 4.725,19.625 5.3,19.05 5.3,9 1.65,9 -0.025,10.675
AGND on Signal Layer 1 "Top Layer-No Net" (solid, pour order 85): 21.85,13.825 21.85,7.65 1.598,7.65 1.65,13.825 1.799,31.639 1.799,34.452 3.618,36.271 6.346,36.271 6.45,36.375 6.675,36.6 6.675,52.8 21.85,52.8 21.85,32.649
GND on Signal Layer 1 "Top Layer-No Net" (solid, pour order 78): 45.725,0.25 38.571,0.25 ccw(c38.571,0.079) 38.45,0.2 cw(c38.51,0.26) 38.425,0.26 38.425,5.15 38.252,5.15 cw(c38.252,7.69) 36.456,5.894 34.9,7.45 34.906,7.456 cw(c36.702,5.66) 36.702,8.2 45.65,8.2

## Keep-outs
Keep-Out Layer:
  lines w0.1: 0,1.295 0,54.98 ; 0,1.295 ccw(c1.32,1.295) 1.32,-0.025 49.725,-0.025 ; 0,54.955 cw(c1.32,54.955) 1.32,56.275 ; 1.295,56.275 49.68,56.275 cw(c49.68,54.955) 51,54.955 ; 49.68,-0.025 ccw(c49.68,1.295) 51,1.295 ; 51,1.25 51,54.955

## Other copper
Bottom:
  pour cut-out: 23.7,26.055 18.443,26.055 ccw(c18.443,25.287) 17.9,25.83 17.9,23.29 23.7,23.29
  pour cut-out: 22.285,20.8 21.35,20.8 cw(c21.572,22.604) 20.139,21.486 21.445,22.336 cw(c22.384,21.397) 22.384,22.725

## Silkscreen, mask and mechanical layers (free items; w line width, h text height)
Top Overlay:
  text "DANGER High voltage" at 49.875,18.825 h3 r90
Bottom Overlay:
  text "DANGER High voltage" at 48.225,18.65 h3 r270
  text "DIN  CS / CLK  GND / +       - / GND GND" at 45.55,11.25 h1.4
  text "ООО 'Микрон Сервис'" at 23.2,8.825 h2
  text "The Scalpel Concept" at 22.25,7.025 h2
  text "v.1.0" at 15.675,5.375 h2
Bottom Solder:
  rectangle: 15.05,46.242 18.075,50.767
  rectangle: 17.9,23.4 23.75,25.8
  rectangle: 14.425,50.5 16.8,56.425
  rectangle: 21.25,21.25 24.125,23.6

## Text inside footprints (layer, text, board x,y; h text height)
HV_Conn: Bottom Overlay "12" at 40.428,51.551 h1.27 r180; Bottom Overlay "1" at 41.444,54.091 h1.27 r180; Bottom Overlay "1" at 40.428,54.091 h1.27 r180; Bottom Overlay "1" at 22.648,54.091 h1.27 r180; Bottom Overlay "2" at 22.648,51.551 h1.27 r180
P1: Top Overlay "2" at 49.217,16.62 h1.27 r270; Top Overlay "1" at 46.677,16.112 h1.27 r270; Top Overlay "7" at 46.677,4.936 h1.27 r270; Top Overlay "8" at 49.217,4.936 h1.27 r270